# Altium PCB Test Footprints.PcbDoc
Units mil, origin at the board's own origin, x right, y up, seen from the top; angles counter-clockwise.
Board outline 6000 x 4000 mil, 2 copper layers (Top Layer, Bottom Layer); 66 components, 56 nets, 249 pads, 12 vias.
Unrouted connection lines stored in the file: 170.
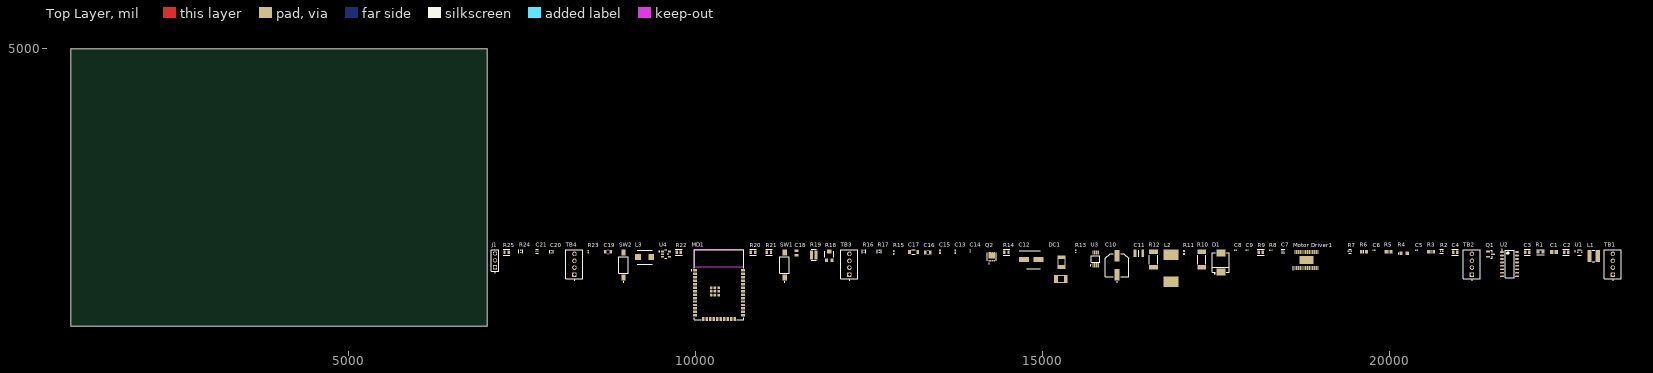
[diagram p0: Top Layer view]
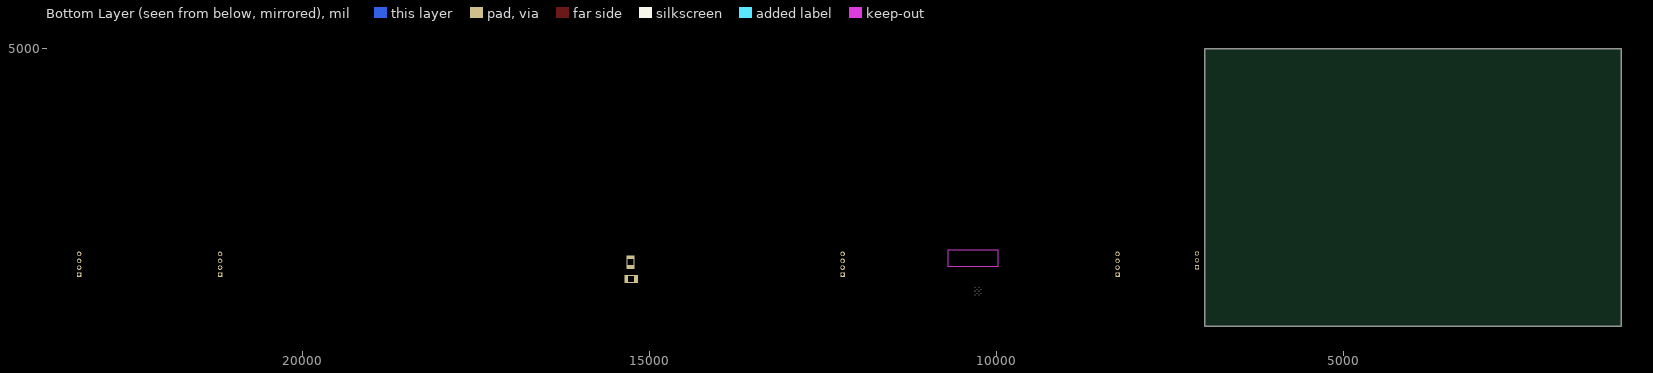
[diagram p1: Bottom Layer view, seen from below]

## Layer stack, top to bottom
Top Solder: solder mask 0.4, Solder Resist, Dk 3.5
Top Layer: signal copper 1.4
Dielectric 1: dielectric 12.6, FR-4, Dk 4.8
Bottom Layer: signal copper 1.4
Bottom Solder: solder mask 0.4, Solder Resist, Dk 3.5

## Board outline
1000,1000 7000,1000 7000,5000 1000,5000

## Design rules (kind name [scope] priority, off if disabled: settings)
Clearance [All] p1: gap=10 ignorepadtopadclearanceinfootprint=FALSE
PolygonConnect [All] p1: connectstyle=Relief reliefconductorwidth=10 reliefentries=4 polygonreliefangle="90 Angle" airgapwidth=10
RoutingVias [All] p1: holewidth=28 width=50 viastyle="Through Hole" minholewidth=28 minwidth=50 maxholewidth=28 maxwidth=50
SolderMaskExpansion [All] p1: expansion=4 istentingtop=FALSE
SupplyNets "Schematic Supply Nets" [InNet('GND')] p1: voltage=0.000
Width [All] p1: maxlimit=10 minlimit=10 preferedwidth=10
30 further rules are at their usual default settings.

## Components (designator, comment, footprint, x,y, rotation, side; value= is the part's Value field where it differs from the comment)
C1 "GRM21BR71E225KA73L" CAPC2013X140X45NL15T25 22370,2070 r0 top
C2 "GRM21BR61C106KE15L" FP-GRM21B-0_1-IPC_C 22545,2065 r0 top
C3 "C0805C106K8PACTU" FP-C0805C-DG-MFG 21985,2065 r0 top value=10uF
C4 "GRM21BR61C106KE15L" FP-GRM21B-0_1-IPC_C 20945,2065 r0 top
C5 "GRM033C71C104KE14J" CAPC0603X33N 20390,2095 r0 top
C6 "GRM033C71C104KE14J" CAPC0603X33N 19775,2095 r0 top
C7 "0.01uF" FP-C0603-030-0_03-IPC_A 18465,2085 r0 top
C8 "0.1uF" CAPC0603X33N 17780,2095 r0 top
C9 "0.1uF" CAPC0603X33N 17950,2095 r0 top
C10 "20SVPF390M" FP-OS-CON-SMT-E12-MFG 16075,1880 r90 top value=390uF
C11 "100uF" CAPC3225X279N 16390,2050 r0 top
C12 "APXF6R3ARA221MF61G" CAPAE660X610N 14840,1960 r0 top
C13 "GRM155R70J104KA01D" CAPC1005X55X25NL05T10 13745,2075 r90 top
C14 "0.1uF" CAPC0603X33N 13960,2085 r90 top
C15 "GRM155R71C183KA01D" CAPC1005X55X25NL05T10 13525,2075 r90 top
C16 "CC0805KRX7R9BB102" FP-CC0805-0_85-MFG 13350,2065 r0 top value="1.0 nF"
C17 "0.47uF" FP-1206-L_3_2_0_2-W_1_6_0-MFG 13145,2070 r0 top
C18 "CC0805JRNPO9BN100" CAPC2012X70N 11455,2055 r90 top
C19 "08055C104J4T2A" FP-0805-L_2_01_0_2-W_1_25-MFG 8740,2075 r0 top
C20 "GRJ155R60J106ME11D" FP-GRJ155-0_2-MFG 7925,2075 r90 top value=10uF
C21 "C1005X5R1A475K050BC" FP-C1005-050-0_15-MFG 7720,2080 r0 top value=4.7uF
D1 "B540C-13-F" FP-SMC-MFG 17570,1920 r90 top value=300pF
DC1 "Deans Connector" DEANS 15280,1925 r90 top
J1 "PREC003SAAN-RC" FP-PREC003SAAN-RC-MFG 7115,1950 r90 top
L1 "74404043010A" WE-LQS_4025 22940,2015 r0 top value=1µH
L2 "DR127" DR127 16855,1640 r90 top
L3 "ASPI-0530HI-2R2M-T2" INDPM5652X300N 9270,1995 r0 top
MD1 "ESP32-WROOM-32D" ESP32-WROOM-32D 10375,1585 r0 top
"Motor Driver1" "DRV8825PWP" SOP65P640X120-29N 18805,1955 r90 top
Q1 "MMSS8550-H-TP" FP-SOT-23-IPC_B 21455,2040 r0 top
Q2 "CSD16327Q3" CSD16327Q3 14270,2000 r0 top
R1 "RC0603FR-07732KL" FP-RC0603-0_55-IPC_A 22175,2070 r0 top value=732kR
R2 "CRCW0402100KFKED" FP-CRCW0402-e3-IPC_C 20750,2080 r0 top value=100kR
R3 "ERJ-S06J103V" RESC2012X70N 20600,2075 r0 top
R4 "ERJ-UP6D3002V" ERJUP6 20210,2050 r0 top
R5 "ERJ-S06J101V" RESC2012X70N 19985,2075 r0 top
R6 "ERJ-S06J101V" RESC2012X70N 19630,2075 r0 top
R7 "CRCW04021K00FKED" FP-CRCW0402-e3-MFG 19430,2080 r0 top value=1kR
R8 "CRCW04028K45FKED" RESC1005X40X25LL05T05 18290,2095 r0 top
R9 "10kOhm" FP-ESR10-IPC_C 18145,2065 r0 top
R10 "200mOhm" WSL2512R2000FEA 17295,1960 r90 top
R11 "1MOhm" RESC1005X40N 17040,2065 r90 top
R12 "200mOhm" WSL2512R2000FEA 16600,1960 r90 top
R13 "CRCW040226K1FKED" RESC1005X40X25LL05T05 15480,2080 r90 top
R14 "10kOhm" FP-ESR10-IPC_C 14480,2065 r0 top
R15 "" RESC1005X40N 12860,2065 r90 top
R16 "CRCW0402100RFKED" FP-CRCW0402-e3-IPC_C 12430,2080 r90 top value=100R
R17 "CRCW04025K11FKED" FP-CRCW0402-e3-IPC_C 12650,2080 r90 top value=5.11kR
R18 "" "SMD POT" 11890,1950 r0 top
R19 "PRL1632-R006-F-T1" FP-PRL1632-MFG 11705,2030 r0 top value=6mR
R20 "ESR10EZPD1002" FP-ESR10-IPC_C 10830,2065 r0 top
R21 "ESR10EZPD1002" FP-ESR10-IPC_C 11060,2065 r0 top
R22 "ESR10EZPD1002" FP-ESR10-IPC_C 9760,2065 r0 top
R23 "442K 1% 0201(0603)" RESC0201(0603)_M 8460,2075 r90 top value="442000.00 Ohm"
R24 "CRCW0402100KFKED" FP-CRCW0402-e3-IPC_C 7485,2080 r90 top value=100kR
R25 "ESR10EZPD1002" FP-ESR10-IPC_C 7280,2065 r0 top
SW1 "FSMSM" TECO-FSMSM-2_V 11285,1885 r90 top
SW2 "FSMSM" TECO-FSMSM-2_V 8965,1885 r90 top
TB1 "TerminalBlocks" PHOENIX_1725672 23340,1685 r90 top
TB2 "TerminalBlock" PHOENIX_1725672 21310,1685 r90 top
TB3 "TerminalBlock" PHOENIX_1725672 12340,1685 r90 top
TB4 "TerminalBlock" PHOENIX_1725672 8380,1685 r90 top
U1 "TPS61023DRLR" FP-DRL0006A-MFG 22740,2065 r0 top
U2 "HX711" TSOP127P600X160-16N 21730,1895 r0 top
U3 "LM3488MM/NOPB" DGK0008A_M 15765,1970 r90 top
U4 "TLV62569DBVR" FP-DBV0005A-MFG 9575,2040 r0 top

## Footprints (in the part's own frame and the unit in brackets; to place one, negate y for a bottom-side part, rotate by r counter-clockwise, add the part's x,y. Pads: shape width x height; smd on the part's side, far side on the other; paste and mask are expansions set on the pad)
CAPAE660X610N [mm]
  rect 3.55x1.85 smd: 1(-2.65,0) 2(2.65,0)
  silkscreen extent -4.43,-3.3 3.3,3.3, body extent -3.7,-3.4 3.7,3.4, height 6.1
CAPC0603X33N [mm]
  rect 0.46x0.42 smd: 1(-0.33,0) 2(0.33,0)
  body extent -0.3,-0.15 0.3,0.15, height 0.33
CAPC1005X55X25NL05T10 [mm] "Chip Capacitor, 2-Leads, Body 1.00x0.50mm, IPC Medium Density"
  rect 0.66x0.62 smd: 1(-0.44,0) 2(0.44,0)
  body extent -0.53,-0.28 0.53,0.27, height 0.55
CAPC2012X70N [mm]
  rect 0.96x1.39 smd: 1(-0.79,0) 2(0.79,0)
  body extent -1,-0.63 1,0.63, height 0.7
CAPC2013X140X45NL15T25 [mm] "Chip Capacitor, 2-Leads, Body 2.00x1.25mm, IPC Medium Density"
  rect 1.25x1.45 smd: 1(-0.85,0) 2(0.85,0)
  body extent -1.08,-0.7 1.07,0.7, height 1.4
CAPC3225X279N [mm]
  rect 1.02x2.72 smd: 1(-1.4,0) 2(1.4,0)
  silkscreen extent 0,-1.15 0,1.15, body extent -1.6,-1.25 1.6,1.25, height 2.79
CSD16327Q3 [mm]
  rect 0.5x0.63 smd: 1(-0.975,-1.435) 2(-0.325,-1.435) 3(0.325,-1.435) 4(0.975,-1.435)
  rect 0.5x0.41 smd: 5(0.975,1.545) 6(0.325,1.545) 7(-0.325,1.545) 8(-0.975,1.545)
  rect 2.45x1.9 smd: 9(0,0.39)
  silkscreen extent -1.65,-2.5 1.65,1.55, body extent -1.65,-1.7 1.65,1.71, height 1.2
DEANS [mm]
  rect 3x5 hole 2 square: 1(-6.223,0.381)
  rect 5x3 hole 2 square: 2(0,0.127)
  body extent -9.6,-3.3 4.77,5.01, height 4.2
DGK0008A_M [mm] "TSOP, 8-Leads, Body 3.1x3.1mm, Pitch 0.65mm, IPC Low Density"
  rrect22% 1.55x0.45 smd: 1(-2.325,0.975) 2(-2.325,0.325) 3(-2.325,-0.325) 4(-2.325,-0.975) 5(2.325,-0.975) 6(2.325,-0.325) 7(2.325,0.325) 8(2.325,0.975)
  silkscreen extent -2.45,-1.55 1.15,1.92, body extent -2.45,-1.5 2.45,1.5, height 0.94
DR127 [mm]
  rect 3.85x5.5 smd: 1(0,0) 2(9.95,0)
ERJUP6 [mm]
  rect 1.15x1.25 smd: 1(-1.175,0) 2(1.175,0)
  silkscreen extent -2.07,-0.05 -1.97,0.05, body extent -1,-0.63 1,0.63, height 0.6
ESP32-WROOM-32D [mm]
  rect 1.5x0.9 smd paste+0 mask+0: 1(-9.639,5.641) 2(-9.639,4.371) 3(-9.639,3.101) 4(-9.639,1.831) 5(-9.639,0.561) 6(-9.639,-0.709) 7(-9.639,-1.979) 8(-9.639,-3.249) 9(-9.639,-4.519) 10(-9.639,-5.789) 11(-9.639,-7.059) 12(-9.639,-8.329) 13(-9.639,-9.599) 14(-9.639,-10.869) 25(7.861,-10.869) 26(7.861,-9.599) 27(7.861,-8.329) 28(7.861,-7.059) 29(7.861,-5.789) 30(7.861,-4.519) 31(7.861,-3.249) 32(7.861,-1.979) 33(7.861,-0.709) 34(7.861,0.561) 35(7.861,1.831) 36(7.861,3.101) 37(7.861,4.371) 38(7.861,5.641)
  rect 0.9x1.5 smd paste+0 mask+0: 15(-6.604,-12.119) 16(-5.334,-12.119) 17(-4.064,-12.119) 18(-2.794,-12.119) 19(-1.524,-12.119) 20(-0.254,-12.119) 21(1.016,-12.119) 22(2.286,-12.119) 23(3.556,-12.119) 24(4.826,-12.119)
  rect 0.9x0.9 smd paste+0 mask+0: 39(-3.789,-3.479) 39(-3.789,-2.079) 39(-3.789,-0.679) 39(-2.389,-3.479) 39(-2.389,-2.079) 39(-2.389,-0.679) 39(-0.989,-3.479) 39(-0.989,-2.079) 39(-0.989,-0.679)
  Keep-Out Layer region: -9.889,6.941 8.111,6.941 8.111,13.131 -9.889,13.131
  silkscreen extent -11.06,-12.44 8.19,13.21, body extent -10.49,-12.97 8.71,13.31, height 0.25
FP-0805-L_2_01_0_2-W_1_25-MFG [mm]
  rect 1x1.25 smd paste+0 mask+0: 1(-1,0) 2(1,0)
  silkscreen extent -0.13,-0.72 0.13,0.72, body extent -1.6,-0.82 1.6,0.82, height 0.25
FP-1206-L_3_2_0_2-W_1_6_0-MFG [mm]
  rect 1x1.6 smd paste+0 mask+0: 1(-1.5,0) 2(1.5,0)
  silkscreen extent -0.63,-0.9 0.63,0.9, body extent -2.1,-1 2.1,1, height 0.25
FP-C0603-030-0_03-IPC_A [mil]
  rect 21.9x18.22 smd paste+0 mask+0: 1(-13.91,0) 2(13.91,0)
  silkscreen extent -25,-25 25,25, body extent -33,-17 33,17, height 10
FP-C0805C-DG-MFG [mm]
  rect 0.95x1.35 smd paste+0 mask+0: 1(-0.75,0) 2(0.75,0)
  silkscreen extent -1.11,-1.08 1.1,1.07, body extent -1.4,-0.85 1.4,0.85, height 0.25
FP-C1005-050-0_15-MFG [mm]
  rect 0.4x0.5 smd paste+0 mask+0: 1(-0.4,0) 2(0.4,0)
  silkscreen extent -0.5,-0.72 0.5,0.72, body extent -0.7,-0.43 0.7,0.43, height 0.25
FP-CC0805-0_85-MFG [mm]
  rect 0.95x1.4 smd paste+0 mask+0: 1(-0.925,0) 2(0.925,0)
  silkscreen extent -0.08,-0.72 0.08,0.72, body extent -1.6,-1.05 1.6,1.05, height 0.25
FP-CRCW0402-e3-IPC_C [mil]
  rect 18.43x18.6 smd paste+0 mask+0: 1(-15.83,0) 2(15.83,0)
  silkscreen extent -25,-27 25,27, body extent -29,-15 29,15, height 10
FP-CRCW0402-e3-MFG [mm]
  rect 0.6x0.6 smd paste+0 mask+0: 1(-0.525,0) 2(0.525,0)
  silkscreen extent -0.53,-0.7 0.53,0.7, body extent -0.92,-0.4 0.92,0.4, height 0.25
FP-DBV0005A-MFG [mm]
  rrect17% 1.1x0.6 smd paste+0 mask+0: 1(-1.3,0.95) 2(-1.3,0) 3(-1.3,-0.95) 4(1.3,-0.95) 5(1.3,0.95)
  silkscreen extent -2.57,-1.53 0.87,1.53, body extent -1.95,-1.78 1.95,1.78, height 0.25
FP-DRL0006A-MFG [mm]
  rrect33% 0.67x0.3 smd paste+0 mask+0: 1(-0.74,0.5) 2(-0.74,0) 3(-0.74,-0.5) 4(0.74,-0.5) 5(0.74,0) 6(0.74,0.5)
  silkscreen extent -1.9,-1.05 0.65,1.05, body extent -1.17,-1.1 1.17,1.1, height 0.25
FP-ESR10-IPC_C [mil]
  rect 33.79x49.69 smd paste+0 mask+0: 1(-30.59,0) 2(30.59,0)
  silkscreen extent -47,-42 47,42, body extent -51,-31 51,31, height 10
FP-GRJ155-0_2-MFG [mm]
  rect 0.45x0.6 smd paste+0 mask+0: 1(-0.475,0) 2(0.475,0)
  silkscreen extent -0.6,-0.63 0.6,0.63, body extent -0.8,-0.45 0.8,0.45, height 0.25
FP-GRM21B-0_1-IPC_C [mil]
  rect 37.71x49.69 smd paste+0 mask+0: 1(-28.63,0) 2(28.63,0)
  silkscreen extent -47,-42 47,42, body extent -51,-31 51,31, height 10
FP-OS-CON-SMT-E12-MFG [mm]
  rect 4.15x1.9 smd paste+0 mask+0: 1(-3.475,0) 2(3.475,0)
  silkscreen extent -6.25,-4.25 4.25,4.25, body extent -5.8,-4.5 5.8,4.5, height 0.25
FP-PREC003SAAN-RC-MFG [mm]
  rect 1.55x1.55 hole 1 paste-2539.97 mask+0: 1(-2.54,0)
  round 1.55 hole 1 paste-2539.97 mask+0: 2(0,0) 3(2.54,0)
  silkscreen extent -4.57,-1.37 3.96,1.37, body extent -4.06,-1.47 4.06,1.47, height 0.25
FP-PRL1632-MFG [mm]
  rect 1.05x3.3 smd paste+0 mask+0: 1(-0.825,0) 2(0.825,0)
  silkscreen extent -0.9,-2.02 0.9,2.02, body extent -1.45,-1.8 1.45,1.8, height 0.25
FP-RC0603-0_55-IPC_A [mil]
  rect 41.68x39.85 smd paste+0 mask+0: 1(-34.52,0) 2(34.52,0)
  silkscreen extent -55,-36 55,36, body extent -75,-40 75,40, height 10
FP-SMC-MFG [mm]
  rect 2.5x3.3 smd paste+0 mask+0: 1(-3.45,0) 2(3.45,0)
  silkscreen extent -4.25,-3.11 3.55,3.11, body extent -4.8,-3.21 4.8,3.21, height 0.25
FP-SOT-23-IPC_B [mm]
  rect 1.474x0.585 smd paste+0 mask+0: 1(-0.935,0.95)
  rrect100% 1.474x0.585 smd paste+0 mask+0: 2(-0.935,-0.95) 3(0.935,0)
  silkscreen extent 0,-1.46 0.65,1.46, body extent -1.92,-1.71 1.92,1.71, height 0.25
INDPM5652X300N [mm]
  rect 2.15x2.2 smd: 1(-2.4,0) 2(2.4,0)
  silkscreen extent -2.8,-2.6 2.8,2.6, body extent -2.8,-2.6 2.8,2.6, height 3
PHOENIX_1725672 [mm]
  rect 1.65x1.65 / inner round 1.65 / far side rect 1.65x1.65 hole 1.1: 1(1.5,3.1)
  round 1.65 hole 1.1: 2(4.04,3.1) 3(6.58,3.1) 4(9.12,3.1)
  silkscreen extent -0.6,0 10.62,6.2, body extent -0.08,0 10.6,6.2, height 8.5
RESC0201(0603)_M [mm] "Chip Resistor, Body 0.6x0.3mm, IPC Low Density"
  rect 0.55x0.55 smd: 1(-0.4,0) 2(0.4,0)
  body extent -0.31,-0.16 0.31,0.16, height 0.3
RESC1005X40N [mm]
  rect 0.7x0.6 smd: 1(-0.55,0) 2(0.55,0)
  body extent -0.5,-0.25 0.5,0.25, height 0.4
RESC1005X40X25LL05T05 [mm] "Chip Resistor, 2-Leads, Body 1.00x0.50mm, IPC High Density"
  rect 0.45x0.45 smd: 1(-0.4,0) 2(0.4,0)
  body extent -0.53,-0.27 0.53,0.28, height 0.4
RESC2012X70N [mm]
  rect 1.05x1.4 smd: 1(-0.95,0) 2(0.95,0)
  silkscreen extent 0,-0.53 0,0.53, body extent -1,-0.63 1,0.63, height 0.6
"SMD POT" [mm]
  rect 1.2x1.2 smd: 1(0,0) 2(2,0)
  rect 1.6x1.5 smd: 3(1,3.25)
  silkscreen extent -0.64,1.14 2.64,3.3, body extent -0.48,-0.22 2.52,3.58, height 1.19
SOP65P640X120-29N [mm]
  rect 1.475x0.45 smd: 1(-2.938,4.225) 2(-2.938,3.575) 3(-2.938,2.925) 4(-2.938,2.275) 5(-2.938,1.625) 6(-2.938,0.975) 7(-2.938,0.325) 8(-2.938,-0.325) 9(-2.938,-0.975) 10(-2.938,-1.625) 11(-2.938,-2.275) 12(-2.938,-2.925) 13(-2.938,-3.575) 14(-2.938,-4.225) 15(2.938,-4.225) 16(2.938,-3.575) 17(2.938,-2.925) 18(2.938,-2.275) 19(2.938,-1.625) 20(2.938,-0.975) 21(2.938,-0.325) 22(2.938,0.325) 23(2.938,0.975) 24(2.938,1.625) 25(2.938,2.275) 26(2.938,2.925) 27(2.938,3.575) 28(2.938,4.225)
  rect 3.1x5.18 smd: 29(0,0)
  silkscreen extent -3.67,4.8 -2.2,4.8, body extent -3.3,-4.9 3.3,4.9, height 1.7
TECO-FSMSM-2_V [mm] "SMD, 2-Leads, Body 6x3.5mm, Pitch 9.19mm"
  rect 2.2x1.6 smd: 1(-4.595,0)
  rect 2.18x1.6 smd: 2(4.595,0)
  silkscreen extent -6.37,-1.75 3,1.75, body extent -4.98,-1.75 4.98,1.75, height 4.4
TSOP127P600X160-16N [mm] "TSOP, 16-Leads, Body 9.90x3.90mm, Pitch 1.27mm, IPC Medium Density"
  oval 1.4x0.6 smd: 1(-2.75,4.445) 2(-2.75,3.175) 3(-2.75,1.905) 4(-2.75,0.635) 5(-2.75,-0.635) 6(-2.75,-1.905) 7(-2.75,-3.175) 8(-2.75,-4.445) 9(2.75,-4.445) 10(2.75,-3.175) 11(2.75,-1.905) 12(2.75,-0.635) 13(2.75,0.635) 14(2.75,1.905) 15(2.75,3.175) 16(2.75,4.445)
  silkscreen extent -2.87,-5.05 1.65,5.42, body extent -3,-5.05 3,5.05, height 1.6
WE-LQS_4025 [mm] "SMD Power Inductor, 2-Leads, body 4x4mm"
  rect 1.5x4.4 smd: 1(-1.525,0) 2(1.525,0)
  silkscreen extent -0.4,-2.1 0.4,2.1, body extent -2,-2 2,2, height 2.15
WSL2512R2000FEA [mm]
  rect 1.65x3.25 smd: 1(-2.85,0) 2(2.85,0)
  silkscreen extent -1.65,-1.52 1.65,1.53, body extent -3.17,-1.59 3.17,1.59, height 0.64

## Part data
C1: library part CMP-2007-03405-1, Manufacturer=Murata, Part Number=GRM21BR71E225KA73L
C2 C4: library part CMP-2007-03453-2, "Chip Multilayer Ceramic Capacitors for General Purpose, 0805, 10uF, X5R, 15%, 10%, 16V", Capacitance=10uF, Case Code (Imperial)=0805, Case Code (Metric)=2012, Dielectric=X5R, Max Operating Temperature=85°C, Min Operating Temperature=-55°C, Package Quantity=1, Tolerance=10%, Voltage=16V, Case/Package=0805, Depth=1.25mm, Height=1.25mm, Lead Free="Lead Free", Length=2mm, Material=Ceramic, Mount="Surface Mount", Packaging="Tape and Reel", Radiation Hardening=No, REACH SVHC="No SVHC", Termination=SMD/SMT, Thickness=0.053inch, Voltage Rating=16V, Voltage Rating (DC)=16V, Width=1.25mm
C3: library part CMP-2007-03243-2, "CAP CER 10UF 10V X5R 0805", 3DS Part Number=220-00001, Capacitance=10uF, Manufacturer=Kemet, Package=C0805C-DG, Temperature="-55°C to +85°C", Temperature Characteristic=X5R, Temperature Coefficient=15%, Temperature Range High=+85°C, Temperature Range Low=-55°C, Tolerance=10%, Voltage=10V, Automotive=No, Category=Cap, ComponentLink2Description=Datasheet, ComponentLink2URL=https://content.kemet.com/datasheets/KEM_C1006_X5R_SMD.pdf, Device Class L1="Passive Components", Device Class L2=Capacitors, Device Class L3="Ceramic Capacitors", Digikey Description="CAP CER 10UF 10V X5R 0805", Height=1.4mm, Ipc Land Pattern Name=CAPC200125X125, Lead Free=Yes, Manufacturer Part Number=C0805C106K8PACTU, Material=Ceramic, Mouser Description="CAP CER 10UF 10V X5R 0805", Octopart=https://octopart.com/c0805c106k8pactu-kemet-98697, RoHS=TRUE, Voltage Rating=10V
C5 C6: library part 0.1uF, Manufacturer_Name="Murata Electronics", Mouser Part Number=81-GRM033C71C104KE4J, Datasheet Link=http://www.murata.com/~/media/webrenewal/support/library/catalog/products/capacitor/mlcc/c02e.pdf, Geometry.Height=0.33mm, Manufacturer_Part_Number=GRM033C71C104KE14J, Mouser Price/Stock=https://www.mouser.co.uk/ProductDetail/Murata-Electronics/GRM033C71C104KE14J?qs=QzBtWTOodeU72T%252BpeIULSA%3D%3D
C7: "C0603X5R1C103M030BA", Capacitance=10nF, Case Code (Imperial)=0201, Case Code (Metric)=0603, Dielectric=X5R, Dielectric Material=Ceramic, Max Operating Temperature=85°C, Min Operating Temperature=-55°C, Package Quantity=15000, Tolerance=20%, Voltage Rating=16V, Case/Package=0201, Height=0.3mm, Lead Free="Lead Free", Length=0.024inch, Mount="Surface Mount", Packaging="Tape and Reel", RoHS Compliant=Yes, Termination=SMD/SMT, Thickness=0.013inch, Voltage Rating (DC)=16V, Weight=6E-06oz, Width=0.012inch
C8 C9 C14: "GRM033C71C104KE14J", Manufacturer_Name="Murata Electronics", Mouser Part Number=81-GRM033C71C104KE4J, Datasheet Link=http://www.murata.com/~/media/webrenewal/support/library/catalog/products/capacitor/mlcc/c02e.pdf, Geometry.Height=0.33mm, Manufacturer_Part_Number=GRM033C71C104KE14J, Mouser Price/Stock=https://www.mouser.co.uk/ProductDetail/Murata-Electronics/GRM033C71C104KE14J?qs=QzBtWTOodeU72T%252BpeIULSA%3D%3D
C10: library part CMP-05428-001334-1, "Conductive Polymer Aluminum Solid Capacitors (OS-CON) 390uF ±20% 20V", Capacitance=390uF, Case/Package=Radial, ESR (Equivalent Series Resistance)=14mR, Leakage Current=1.56mA, Max Operating Temperature=105°C, Min Operating Temperature=-55°C, Package Quantity=400, Ripple Current=4.95A, Tolerance=20%, Voltage=20V, Diameter=8mm, Dissipation Factor=12%, Height=11.9mm, Height - Seated (Max)=0.472inch, Lead Free="Lead Free", Length=11.9mm, Life (Hours)=5000Hour, Mount="Surface Mount", Number of Pins=12, Packaging="Tape and Reel", Polarity=Polar, REACH SVHC="No SVHC", Ripple Current (AC)=4.95A, RoHS Compliant=Yes, Series="OS-CON, SVPF", Termination=SMD/SMT, Voltage Rating=20V, Voltage Rating (DC)=20V
C11: "1210YD107MAT2A"
C12: "Capacitor Polarised", Manufacturer_Name=Chemi-Con, Mouser Part Number=661-APXF6R3RA221MF61, Arrow Part Number=APXF6R3ARA221MF61G, Arrow Price/Stock=https://www.arrow.com/en/products/apxf6r3ara221mf61g/united-chemi-con?region=nac, Datasheet Link=https://www.chemi-con.co.jp/products/relatedfiles/capacitor/catalog/PXFRA-e.PDF, Height=6.1mm, Manufacturer_Part_Number=APXF6R3ARA221MF61G, Mouser Price/Stock=https://www.mouser.co.uk/ProductDetail/United-Chemi-Con/APXF6R3ARA221MF61G?qs=p6VZ%252BklCkRRzB%2FOtUAGX5A%3D%3D
C13: library part CMP-2008-04586-1, Manufacturer=Murata, Part Number=GRM155R70J104KA01D
C15: library part CMP-2008-03947-1, Manufacturer=Murata, Part Number=GRM155R71C183KA01D
C16: library part CMP-1036-02978-3, "CAP CER 1000PF 50V X7R 0805", Capacitance="1.0 nF", Manufacturer=Yageo, Package=CC0805-0.85, Temperature="-30°C to +85°C", Temperature Characteristic=X7R, Temperature Range High=+85°C, Temperature Range Low=-30°C, Tolerance=0.1, Voltage Rating="50 V", Automotive=No, Category=Cap, ComponentLink2Description=Datasheet, ComponentLink2URL=http://www.yageo.com/documents/recent/UPY-GPHC_Y5V_6.3V-to-50V_8.pdf, Device Class L1="Passive Components", Device Class L2=Capacitors, Device Class L3="Ceramic Capacitors", Digikey Description="CAP CER 1000PF 50V X7R 0805", Footprint Url=http://www.yageo.com/exep/pages/download/literatures/UPY-C_GEN_24.pdf, Height=0.95mm, Ipc Land Pattern Name=CAPC200125X85, Lead Free=Yes, Manufacturer Part Number=CC0805KRX7R9BB102, Material=Ceramic, Mouser Description="Multilayer Ceramic Capacitors MLCC - SMD/SMT 1.0nF 50V X7R 10%", Octopart=https://octopart.com/cc0805krx7r9bb102-yageo-39467744, RoHS=TRUE
C17: library part CMP-04427-014563-1, "12065C474K4Z2A", Capacitance=470nF, Case Code (Imperial)=1206, Case Code (Metric)=3216, Dielectric=X7R, Max Operating Temperature=125°C, Min Operating Temperature=-55°C, Ratings=AEC-Q200, Tolerance=10%, Voltage Rating=50V, Case/Package=1206, Depth=1.6mm, Features="Soft Termination", Length=0.126inch, Mount="Surface Mount", Packaging="Tape and Reel", Radiation Hardening=No, RoHS Compliant=Yes, Series=FLEXITERM®, Thickness=0.06inch, Voltage Rating (DC)=50V, Width=0.063inch
C18: "Capacitor", Manufacturer_Name=YAGEO, Mouser Part Number=603-CC805JRNPO9BN100, Datasheet Link=https://www.mouser.co.uk/datasheet/2/447/UPY_GP_NP0_16V_to_50V_18-1730511.pdf, Height=0.7mm, Manufacturer_Part_Number=CC0805JRNPO9BN100, Mouser Price/Stock=https://www.mouser.co.uk/ProductDetail/YAGEO/CC0805JRNPO9BN100?qs=DBlb8Oi07mYgwCvOiwRYAw%3D%3D
C19: library part CMP-2007-04725-2, "Automotive Ceramic Capacitor, 0805, 100nF, 5%, X7R, 15%, 50V", Capacitance=100nF, Case Code (Imperial)=0805, Case Code (Metric)=2012, Dielectric=X7R, Max Operating Temperature=125°C, Min Operating Temperature=-55°C, Package Quantity=4000, Ratings=AEC-Q200, Tolerance=5%, Voltage Rating=50V, Case/Package=0805, Construction=Flat, Contact Plating=Tin, Depth=1.25mm, Dissipation Factor=2.5%, Height=0.94mm, Lead Free="Lead Free", Length=2.01mm, Mount="Surface Mount", Number of Pins=2, Packaging="Tape and Reel", Radiation Hardening=No, RoHS Compliant=Yes, Series=-, Termination=SMD/SMT, Thickness=0.037inch, Voltage Rating (DC)=50V, Width=0.049inch
C20: library part CMP-06035-062410-1, "CAP CER 10UF 6.3V X5R 0402", Capacitance=10uF, Case Code (Imperial)=0402, Case Code (Metric)=1005, Max Operating Temperature=85°C, Min Operating Temperature=-55°C, Tolerance=20%, Voltage Rating=6.3V, Case/Package=0402, Features="Soft Termination", Length=0.039inch, Mount="Surface Mount", Packaging="Cut Tape", RoHS Compliant=Yes, Thickness=0.028inch, Width=0.02inch
C21: library part CMP-2000-05997-2, "CAP CER 4.7UF 10V X5R 0402", Capacitance=4.7uF, Case Code (Imperial)=0402, Case Code (Metric)=1005, Dielectric=X5R, Dielectric Material=Ceramic, Max Operating Temperature=85°C, Min Operating Temperature=-55°C, Package Quantity=10000, Tolerance=10%, Voltage Rating=10V, Case/Package=0402, Lead Free="Lead Free", Length=0.039inch, Mount="Surface Mount", Packaging="Cut Tape", REACH SVHC="No SVHC", RoHS Compliant=Yes, Series=C, Thickness=0.022inch, Voltage Rating (DC)=10V, Width=0.02inch
D1: library part CMP-2000-05097-3, "DIODE SCHOTTKY 40V 5A SMC", Capacitance=300pF, Forward Current=5A, Manufacturer="Diodes Inc.", Max Junction Temp=+150°C, Max Repetitive Reverse Voltage=40V, Max Surge Forward Current=100A, Package=SMC, Peak Reverse Current=0.5mA, Temperature="-55°C to +150°C", Temperature Range Low=-55°C, Automotive=No, Automotive Grade=NA, Category=Diode, ComponentLink2Description=Datasheet, ComponentLink2URL=https://www.diodes.com/assets/Datasheets/ds13012.pdf, Device Class L1="Discrete Semiconductors", Device Class L2=Diodes, Device Class L3="Schottky Diodes", Digikey Description="DIODE SCHOTTKY 40V 5A SMC", Footprint Url=https://www.diodes.com/assets/Package-Files/SMC.pdf, Height=2.5mm, Lead Free=Yes, Manufacturer Part Number=B540C-13-F, Mouser Description="Diode: Schottky rectifying; SMD; 40V; 5A; SMC; Package: reel, tape", Octopart=https://octopart.com/b540c-13-f-diodes+inc.-325873, Reverse Voltage=40V, RoHS=TRUE, Standoff Height=0.1mm, Temperature Range High=+150°C
J1: library part CMP-00595-22265080-1, "PREC003SAAN-RC Conn Header Vert 3POS 2.54MM", Color=Black, Current Rating=3A, Max Operating Temperature=105°C, Min Operating Temperature=-40°C, Connector Type="Male Pin", Contact Material="Nickel, Tin", Contact Mating Length=5.842mm, Contact Plating=Tin, Height=8.74mm, Mount="Through Hole", NexarPartId=22265080, Number of Contacts=3, Number of Positions=3, Number of Rows=1, Packaging=Bulk, Pitch=2.54mm, RoHS=Compliant, Termination=Solder
L1: library part CMP-03913-77814851-1, "74404043010A WE-LQS SMT Semi-Shielded Power Inductor", Ambient Temperature Range High=85°C, Ambient Temperature Range Low=-40°C, Current Rating=4.9A, DC Resistance (DCR)=14mΩ, Inductance=1µH, Inductance Tolerance=30%, Max Operating Temperature=125°C, Height=2.5mm, Length=4mm, Min Operating Temperature=-40°C, NexarPartId=77814851, RoHS=Compliant, Width=4mm
L3: "Inductor", Manufacturer_Name=ABRACON, Mouser Part Number=815-ASPI0530HI2R2MT2, Arrow Part Number=ASPI-0530HI-2R2M-T2, Arrow Price/Stock=https://www.arrow.com/en/products/aspi-0530hi-2r2m-t2/abracon, Datasheet Link=https://abracon.com/Magnetics/power/ASPI-0530HI.pdf, Height=3mm, Manufacturer_Part_Number=ASPI-0530HI-2R2M-T2, Mouser Price/Stock=https://www.mouser.co.uk/ProductDetail/ABRACON/ASPI-0530HI-2R2M-T2?qs=bWAYEm3xoCbWzF7ky072%2FA%3D%3D
MD1: library part ee866abf0b6c51247b7f5cdebf2f250, "RX TXRX MOD WIFI SURFACE MOUNT", Case/Package=SMD/SMT, Frequency=2.5GHz, Max Operating Temperature=85°C, Min Operating Temperature=-40°C, Operating Supply Voltage=3.6V, Package Quantity=550, Data Rate=150Mbps, Mount="Surface Mount", Packaging="Cut Tape", Sensitivity=-98dBm, Weight=0.088185oz
"Motor Driver1": "2.5A Stepper Motor Driver HTSSOP28 Texas Instruments DRV8825PWP, Stepper Motor Driver, 28-Pin HTSSOP", Manufacturer_Name="Texas Instruments", Mouser Part Number=595-DRV8825PWP, Datasheet Link=http://www.ti.com/lit/ds/symlink/drv8825.pdf, Geometry.Height=1.2mm, Manufacturer_Part_Number=DRV8825PWP, Mouser Price/Stock=https://www.mouser.co.uk/ProductDetail/Texas-Instruments/DRV8825PWP?qs=L4ss%2FyqpMWT%252BKNufX9tf3Q%3D%3D
Q1: library part CMP-56214-000002-1, "TRANS PNP 25V 1.5A SOT23", Case/Package=SOT-23, Collector Base Voltage (VCBO)=40V, Collector Emitter Breakdown Voltage=25V, Collector Emitter Saturation Voltage=500mV, Emitter Base Voltage (VEBO)=1.6V, Max Collector Current=1.5A, Max Operating Temperature=150°C, Max Power Dissipation=625mW, Min Operating Temperature=-55°C, Package Quantity=1, Transition Frequency=100MHz, Collector Emitter Voltage (VCEO)=500mV, Element Configuration=Single, Gain Bandwidth Product=100MHz, hFE Min=40, Lead Free="Lead Free", Max Breakdown Voltage=25V, Mount="Surface Mount", Packaging="Tape and Reel", Polarity=PNP
Q2: "MOSFET (N-Channel)", Manufacturer_Name="Texas Instruments", Mouser Part Number=595-CSD16327Q3, Arrow Part Number=CSD16327Q3, Arrow Price/Stock=https://www.arrow.com/en/products/csd16327q3/texas-instruments?region=nac, Datasheet Link=https://www.ti.com/lit/ds/symlink/csd16327q3.pdf?HQS=dis-mous-null-mousermode-dsf-pf-null-wwe&ts=1620965148072&ref_url=https%253A%252F%252Fwww.mouser.com%252F, Height=1.1mm, Manufacturer_Part_Number=CSD16327Q3, Mouser Price/Stock=https://www.mouser.co.uk/ProductDetail/Texas-Instruments/CSD16327Q3?qs=3jfYfyvUSwCG33cNK3hedw%3D%3D
R1: library part CMP-2000-04127-2, "RES SMD 732K OHM 1% 1/10W 0603", Case Code (Imperial)=0603, Case Code (Metric)=1608, Max Operating Temperature=155°C, Max Power Dissipation=100mW, Min Operating Temperature=-55°C, Resistance=732kR, Resistor Type="Thick Film", Temperature Coefficient=100ppm/°C, Tolerance=1%, Voltage Rating=50V, Case/Package=0603, Construction=Rectangular, Depth=0.8mm, Features="Moisture Resistant", Height=0.45mm, Lead Free="Lead Free", Length=1.6mm, Military Standard=Not, Number of Terminations=2, Packaging="Tape and Reel", Power Rating=100mW, RoHS Compliant=Yes, Series=RC, Size Code=0603, Termination=SMD/SMT, Voltage Rating (DC)=50V, Width=0.8mm
R2 R24: library part CMP-2002-08123-3, "RES Thick Film, 100kΩ, 1%, 0.063W, 100ppm/°C, 0402", Case Code (Imperial)=0402, Case Code (Metric)=1005, Max Operating Temperature=155°C, Max Power Dissipation=63mW, Min Operating Temperature=-55°C, Package Quantity=10000, Resistance=100kR, Temperature Coefficient=100ppm/°C, Tolerance=1%, Voltage Rating=50V, Case/Package=0402, Composition="Thick Film", Contact Plating=Tin, Depth=0.5mm, Features="Automotive AEC-Q200", Height=0.35mm, Lead Free="Lead Free", Length=1mm, Military Standard=Not, Mount="Surface Mount", Number of Pins=2, Number of Terminations=2, Packaging="Tape and Reel", Power Rating=63mW, Radiation Hardening=No, Termination=SMD/SMT, Voltage Rating (DC)=50V, Weight=2.3E-05oz, Width=0.02inch
R3: "Resistor", Manufacturer_Name=Panasonic, Mouser Part Number=667-ERJ-S06J103V, Datasheet Link=https://industrial.panasonic.com/cdbs/www-data/pdf/RDP0000/AOA0000C334.pdf, Height=0.7mm, Manufacturer_Part_Number=ERJ-S06J103V, Mouser Price/Stock=https://www.mouser.co.uk/ProductDetail/Panasonic/ERJ-S06J103V?qs=Zyl8A9hlmJqKI11OB00qpA%3D%3D
R4: "Resistor", Manufacturer_Name=Panasonic, Datasheet Link=https://industrial.panasonic.com/cdbs/www-data/pdf/RDP0000/AOA0000C337.pdf, Height=0.7mm, Manufacturer_Part_Number=ERJ-UP6D3002V
R5 R6: "Resistor", Manufacturer_Name=Panasonic, Mouser Part Number=667-ERJ-S06J101V, Datasheet Link=https://industrial.panasonic.com/cdbs/www-data/pdf/RDP0000/AOA0000C334.pdf, Height=0.7mm, Manufacturer_Part_Number=ERJ-S06J101V, Mouser Price/Stock=https://www.mouser.co.uk/ProductDetail/Panasonic/ERJ-S06J101V?qs=Zyl8A9hlmJqshrwxn1wW6g%3D%3D
R7: library part CMP-2002-08276-2, "RES Thick Film, 1kΩ, 1%, 0.063W, 100ppm/°C, 0402", Case Code (Imperial)=0402, Case Code (Metric)=1005, Max Operating Temperature=155°C, Max Power Dissipation=63mW, Min Operating Temperature=-55°C, Package Quantity=10, Resistance=1kR, Temperature Coefficient=100ppm/°C, Tolerance=1%, Voltage Rating=50V, Case/Package=0402, Composition="Thick Film", Contact Plating=Tin, Depth=0.5mm, Features="Automotive AEC-Q200", Height=0.35mm, Lead Free="Lead Free", Length=1mm, Military Standard=Not, Mount="Surface Mount", Number of Pins=2, Number of Terminations=2, Packaging="Tape and Reel", Power Rating=63mW, Radiation Hardening=No, Termination=SMD/SMT, Voltage Rating (DC)=50V, Weight=2.3E-05oz, Width=0.5mm
R8: library part CMP-2002-00257-1, Manufacturer="Vishay Dale", Part Number=CRCW04028K45FKED
R9 R14: library part CMP-08839-028179-1, "ESR10EZPD1002", RoHS Compliant=Yes
R10 R12: "WSL2512R2000FEA"
R11: "CRCW04021M00FKEDHP"
R13: library part CMP-2002-08422-1, Manufacturer="Vishay Dale", Part Number=CRCW040226K1FKED
R15: library part 50kOhm, "CRCW040250K0FKED"
R16: library part CMP-1011-00397-3, "RES Thick Film, 100Ω, 1%, 0.063W, 100ppm/°C, 0402", Case Code (Imperial)=0402, Case Code (Metric)=1005, Max Operating Temperature=155°C, Max Power Dissipation=63mW, Min Operating Temperature=-55°C, Package Quantity=10, Resistance=100R, Temperature Coefficient=100ppm/°C, Tolerance=1%, Voltage Rating=50V, Case/Package=0402, Composition="Thick Film", Contact Plating=Tin, Depth=0.5mm, Features="Automotive AEC-Q200", Height=0.35mm, Lead Free="Lead Free", Length=1mm, Military Standard=Not, Mount="Surface Mount", Number of Terminations=2, Packaging="Tape and Reel", Power Rating=63mW, Radiation Hardening=No, Termination=SMD/SMT, Voltage Rating (DC)=50V, Weight=2.3E-05oz, Width=0.02inch, Working Voltage=50V
R17: library part CMP-2002-00117-2, "RES Thick Film, 5.11kΩ, 1%, 0.063W, 100ppm/°C, 0402", Case Code (Imperial)=0402, Case Code (Metric)=1005, Max Operating Temperature=155°C, Max Power Dissipation=63mW, Min Operating Temperature=-55°C, Package Quantity=10, Resistance=5.11kR, Temperature Coefficient=100ppm/°C, Tolerance=1%, Voltage Rating=50V, Case/Package=0402, Composition="Thick Film", Contact Plating=Tin, Depth=0.5mm, Features="Automotive AEC-Q200", Height=0.35mm, Lead Free="Lead Free", Length=1mm, Military Standard=Not, Mount="Surface Mount", Number of Pins=2, Number of Terminations=2, Packaging="Tape and Reel", Power Rating=63mW, Radiation Hardening=No, Termination=SMD/SMT, Voltage Rating (DC)=50V, Weight=2.3E-05oz, Width=0.02inch
R18: library part 30kPot, "TC33X-2-303E Bourns"
R19: library part CMP-2003-04759-2, "6 mOhms ±1% 1W Chip Resistor Wide 0612 (1632 Metric), Current Sense Thin Film", Case Code (Imperial)=1206, Case Code (Metric)=3216, Max Operating Temperature=125°C, Max Power Dissipation=1W, Min Operating Temperature=-55°C, Package Quantity=1, Resistance=6mR, Resistor Type="Thin Film", Temperature Coefficient=350ppm/°C, Tolerance=1%, Case/Package=1206, Height=0.024inch, Lead Free="Lead Free", Length=0.063inch, Number of Terminations=2, Packaging="Tape and Reel", Power Rating=1W, RoHS Compliant=Yes, Series=PRL, Technology="THIN FILM", Termination=SMD/SMT, Width=0.126inch
R20 R21 R22 R25: library part CMP-08839-028179-1, "10kΩ ±0.5% 0.4W 0805 Anti-Surge Chip Resistor AEC-Q200", RoHS Compliant=Yes
R23: library part CMP-1010-00715-1, "442K 0.05W 1% 0201 (0603 Metric)  SMD", Case-EIA=0201, Case-Metric=0603, Power="0.05 W", Tolerance="1 %", Technology=SMT
SW1 SW2: library part CMP-2000-07511-1, "FSMSM Push Button Switch, 50 mA, -35 to 85 degC, 2-Pin SMD, RoHS, Bulk", Case\/Package=SMD/SMT, Contact Current Rating=50mA, Contact Resistance=100mOhm, Manufacturer="TE Connectivity", Max Operating Temperature=85degC, Max Voltage Rating (DC)=12V, Min Operating Temperature=-35degC, Operating Force=180gf, Package Description="2-Pin Surface Mount Device, Body 6 x 3.5 mm, Pitch 9.19 mm", Package Quantity=1000, Voltage Rating (DC)=24V, Actuator Length=1.07mm, Actuator Material=Polyamide, Contact Material=Brass, Contact Plating=Silver, Current Rating=50mA, Datasheet URL=http://www.te.com/commerce/DocumentDelivery/DDEController?Action=showdoc&DocId=Customer+Drawing%7F1437566-3%7FC2%7Fpdf%7FEnglish%7FENG_CD_1437566-3_C2_1437566_3_1_c.dwg.pdf%7F1437566-3, Datasheet Version="Rev. C2, 08/2014", Electrical Life=20000Cycles, ELV=Compliant, Illumination Type=Illuminated, Lead Free=LeadFree, Manufacturer URL=http://www.te.com/, Mechanical Life=20000Cycles, Mount=SurfaceMount, Mounting Technology=SurfaceMount, Orientation=Straight, Package Reference=FSMSM, Packaging=LoosePiece, REACH SVHC=Unknown, RoHSCompliant=true, Switch Travel=0.25mm, Termination=GullWing, Throw Configuration=SPST
TB1: library part TerminalBlock
U1: library part CMP-04918-000638-1, "FINISH GOODS FOR TPS61023"
U3: library part CMP-0063-01179-4, "High Efficiency Low-Side N-Channel Controller for Switching Regulators, 8-pin MSOP, Pb-Free, 1000 Reel", Manufacturer="Texas Instruments", PackageTopMarking=ZXTT*S21B, PowerWise=N, Code_JEDEC=MO-187-AA, ComponentLink1Description="Datasheet URL", ComponentLink1URL=http://www.ti.com/general/docs/lit/getliterature.tsp?genericPartNumber=LM3488&fileType=pdf, CompType=MiscPower, High-Reliability=Y, PackageDescription="MINI SOIC, .118 x .118 x .034in, 8 Lead, .0256in Pitch", PackageReference=DGK0008A, PartNumber=LM3488MM/NOPB, PinCount=8, RoHS=Y
U4: library part CMP-04918-000387-1, "IC REG BUCK ADJ 2A SOT23-5", Case/Package=SOT-23-5, Max Input Voltage=5.5V, Max Operating Temperature=125°C, Min Input Voltage=2.5V, Min Operating Temperature=-40°C, Min Output Voltage=600mV, Output Current=2A, Switching Frequency=1.5MHz, Max Output Voltage=5.5V, Mount="Surface Mount", Output Configuration=Positive, Output Type=Adjustable, Packaging="Cut Tape", RoHS Compliant=Yes, Synchronous Rectifier=Yes

## Via types
v1: diameter 15, hole 7, Top Layer to Bottom Layer, 12 vias

## Nets (pads, with @x,y where several pads share a name; then routed paths per layer and width w, separated by ;. In a path a pad name is that pad's centre, name@x,y a point inside that pad or via, vN(x,y) a via of type N, cw(c..) or ccw(c..) an arc to the next point about the centre after c; other vN are vias at no path point)
GND: "Motor Driver1.14" "Motor Driver1.28" "Motor Driver1.29" C1.2 C2.2 C3.2 C4.2 C5.2 C8.1 C10.1 C11.1 C12.2 C13.2 C14.1 C16.2 C17.2 C18.2 C19.2 C20.2 C21.2 DC1.2 J1.3 MD1.1 MD1.15 MD1.38 MD1.39 R2.2 R4.2 R7.2 R10.2 R12.2 R13.2 R17.2 R18.2 R19.2 R21.2 R24.2 R25.2 SW1.2 SW2.2 TB1.4 TB2.3 U1.4 U2.5 U2.9 U2.10 U2.14 U2.15 U3.4 U3.5 U4.2
NetC1_1: C1.1 C2.1 Q1.2 R1.1 TB1.1 U1.6 U2.1 U2.16
NetC3_1: C3.1 C12.1 C13.1 C21.1 DC1.1 L1.1 L2.1 U1.2 U1.3 U3.8 U4.1 U4.4
NetC4_1: C4.1 Q1.3 R3.1 TB2.4 U2.3
NetC5_1: C5.1 U2.6
NetC6_1: C6.1 R6.2 U2.8
NetC6_2: C6.2 R5.2 U2.7
NetC7_1: "Motor Driver1.1" C7.1
NetC7_2: "Motor Driver1.2" C7.2
NetC8_2: "Motor Driver1.4" "Motor Driver1.11" C8.2 C9.1 C10.2 C11.2 C14.2 D1.1 R8.2 R11.1
NetC9_2: "Motor Driver1.3" C9.2 R11.2
NetC15_1: C15.1 C16.1 U3.2
NetC15_2: C15.2 R17.1
NetC17_1: "Motor Driver1.15" C17.1 R9.1 R14.1 R15.1
NetC18_1: C18.1 Q2.1 Q2.2 Q2.3 R16.2 R19.1
NetC19_1: C19.1 MD1.3 R22.2 SW2.1
NetC20_1: "Motor Driver1.16" C20.1 L3.2 MD1.2 R20.1 R22.1 R23.1
NetD1_2: D1.2 L2.2 Q2.5 Q2.6 Q2.7 Q2.8 Q2.9
NetJ1_1: J1.1 MD1.34
NetJ1_2: J1.2 MD1.35
NetL1_2: L1.2 U1.5
NetL3_1: L3.1 U4.3
NetMD1_10: MD1.10 TB4.3
NetMD1_11: MD1.11 TB4.4
NetMD1_12: "Motor Driver1.21" MD1.12
NetMD1_13: "Motor Driver1.22" MD1.13
NetMD1_14: "Motor Driver1.20" MD1.14
NetMD1_16: "Motor Driver1.17" MD1.16
NetMD1_23: MD1.23 R25.1
NetMD1_24: MD1.24 R21.1
NetMD1_25: MD1.25 R20.2 SW1.1
NetMD1_26: MD1.26 U2.12
NetMD1_29: MD1.29 TB1.2
NetMD1_30: MD1.30 TB1.3
NetMD1_33: MD1.33 U2.11
NetMD1_36: MD1.36 TB4.1
NetMD1_37: MD1.37 TB4.2
"NetMotor Driver1_5": "Motor Driver1.5" TB3.1
"NetMotor Driver1_6": "Motor Driver1.6" R10.1
"NetMotor Driver1_7": "Motor Driver1.7" TB3.2
"NetMotor Driver1_8": "Motor Driver1.8" TB3.3
"NetMotor Driver1_9": "Motor Driver1.9" R12.1
"NetMotor Driver1_10": "Motor Driver1.10" TB3.4
"NetMotor Driver1_12": "Motor Driver1.12" "Motor Driver1.13" R15.2 R18.1 R18.3
"NetMotor Driver1_18": "Motor Driver1.18" R14.2
"NetMotor Driver1_27": "Motor Driver1.27" R9.2
NetQ1_1: Q1.1 U2.2
NetQ2_4: Q2.4 U3.6
NetR1_2: R1.2 R2.1 U1.1
NetR3_2: R3.2 R4.1
NetR5_1: R5.1 TB2.2
NetR6_1: R6.1 TB2.1
NetR7_1: R7.1 R8.1 U3.3
NetR13_1: R13.1 U3.7
NetR16_1: R16.1 U3.1
NetR23_2: R23.2 R24.1 U4.5
pads on no net: "Motor Driver1.19" "Motor Driver1.23" "Motor Driver1.24" "Motor Driver1.25" "Motor Driver1.26" MD1.4 MD1.5 MD1.6 MD1.7 MD1.8 MD1.9 MD1.17 MD1.18 MD1.19 MD1.20 MD1.21 MD1.22 MD1.27 MD1.28 MD1.31 MD1.32 U2.4 U2.13
copper on no net:
  other v1: 10255,1450 10310,1450 10225,1475 10280,1475 10335,1475 10255,1505 10310,1505 10225,1530 10280,1530 10335,1530 10255,1560 10310,1560